# EAGLE board SparkFun_Qwiic_FS3000_proto_panel_c (EAGLE 9.6.2)
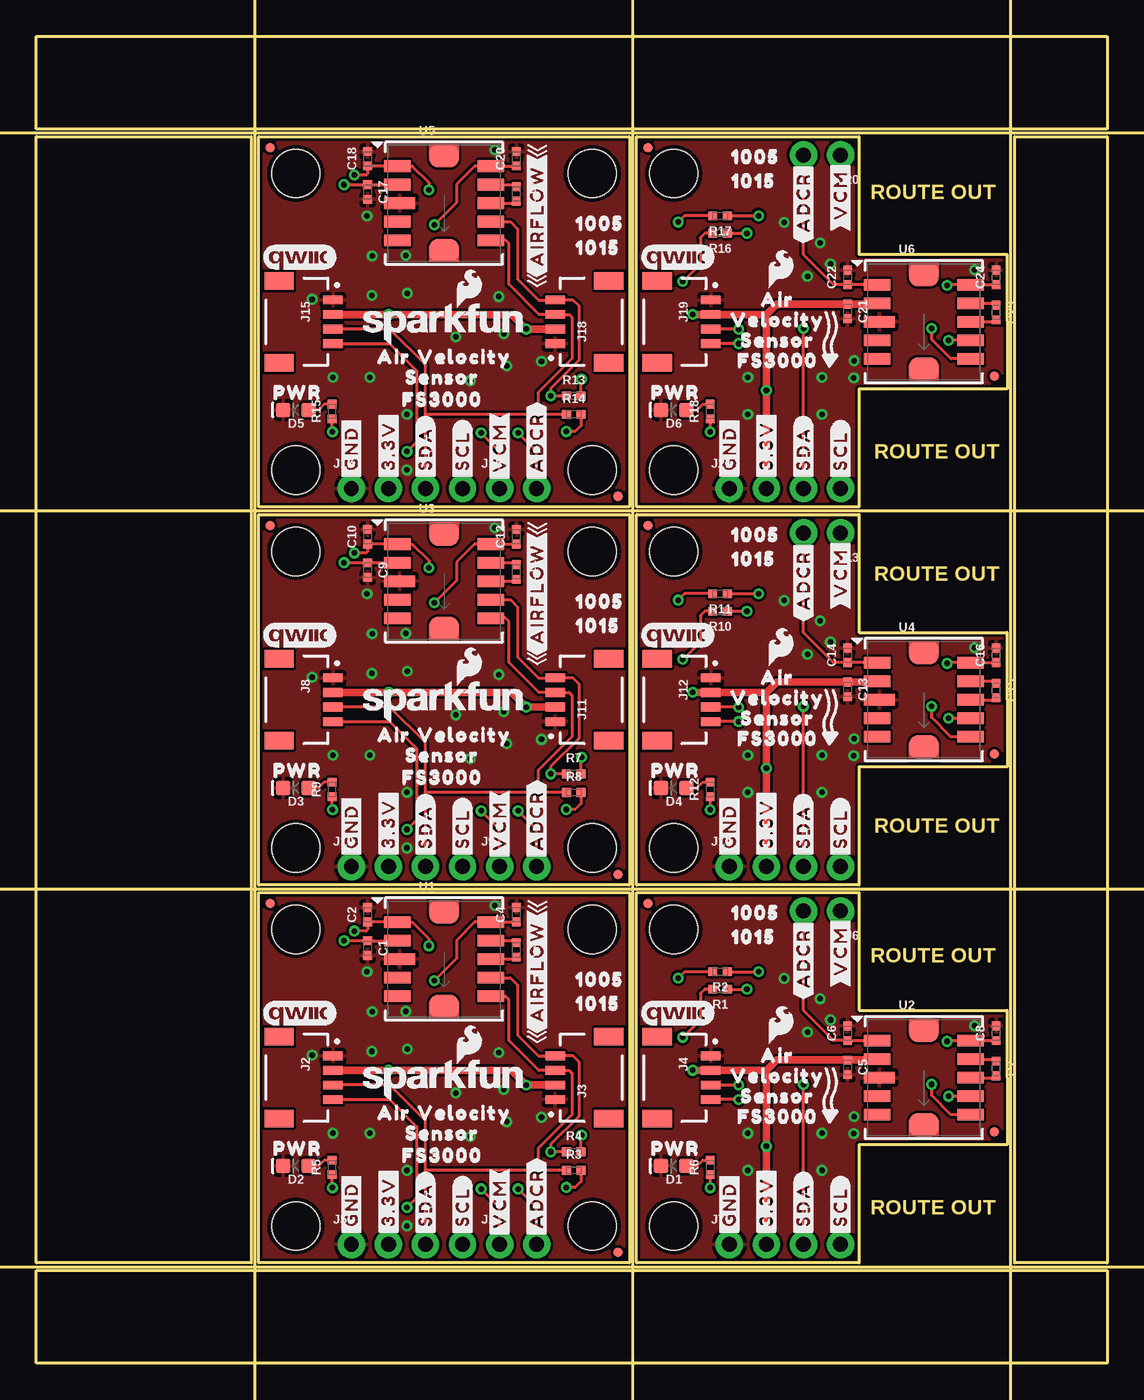
[diagram p0: board, top side]
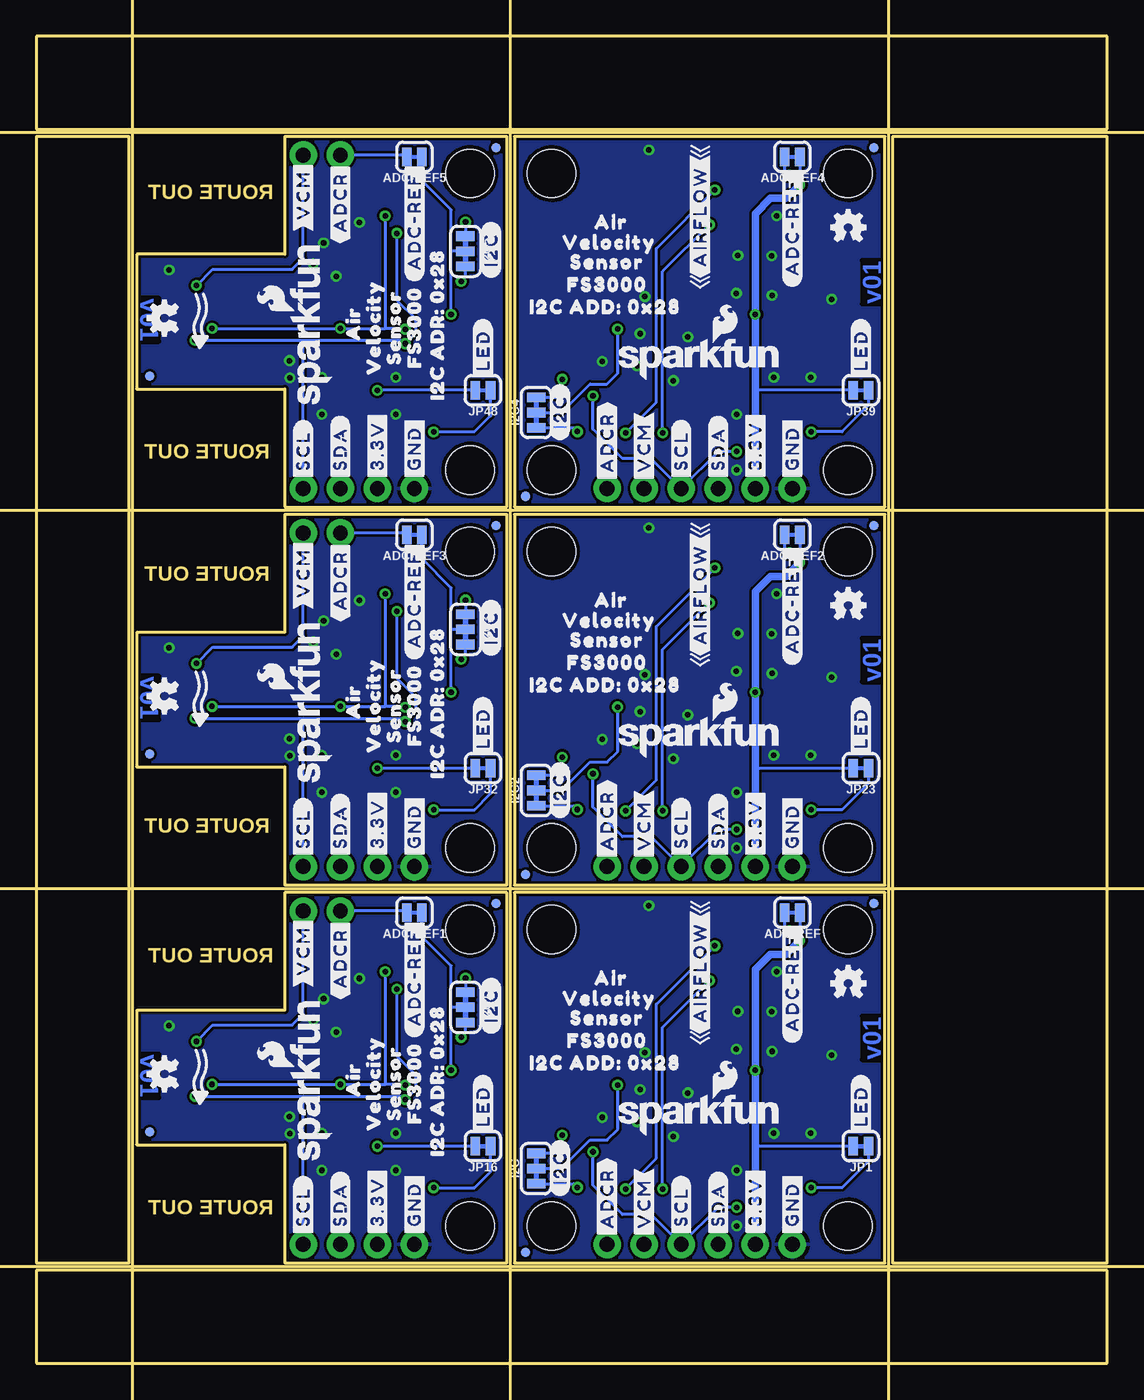
[diagram p1: board, bottom side, seen from below]

Size 73.41 x 90.93 mm. Coordinates in mm from the lower left corner, seen from the top.
Outline: 15.24,6.86 15.24,32.26 40.64,32.26 40.64,6.86 15.24,6.86
Outline: 41.15,6.86 41.15,32.26 56.39,32.26 56.39,24.18 66.52,24.18 66.55,14.96 56.39,14.96 56.39,6.86 41.15,6.86
Outline: 15.24,32.77 15.24,58.17 40.64,58.17 40.64,32.77 15.24,32.77
Outline: 41.15,32.77 41.15,58.17 56.39,58.17 56.39,50.09 66.52,50.09 66.55,40.87 56.39,40.87 56.39,32.77 41.15,32.77
Outline: 15.24,58.67 15.24,84.07 40.64,84.07 40.64,58.67 15.24,58.67
Outline: 41.15,58.67 41.15,84.07 56.39,84.07 56.39,76 66.52,76 66.55,66.78 56.39,66.78 56.39,58.67 41.15,58.67
Outline: 73.41,6.86 67.06,6.86 67.06,84.07 73.41,84.07 73.41,6.86
Outline: 73.41,90.93 73.41,84.58 0,84.58 0,90.93 73.41,90.93
Outline: 73.41,6.35 73.41,0 0,0 0,6.35 73.41,6.35
Outline: 14.73,6.86 0,6.86 0,84.07 14.73,84.07 14.73,6.86
Copper layers (1*16): Top 0.035mm / dielectric 1.5mm / Bottom 0.035mm
Design rules "SparkFun-2-Layer-General-JLCPCB": minimum track width 7mil, minimum drill 0.3mm, track to track 7mil, track to pad 7mil, pad to pad 7mil, via to via 7mil, smd to smd 7mil, copper to edge 7mil, drill to drill 7mil, minimum pad ring 7mil, minimum via ring 7mil, stop-mask expansion 3mil, vias tented up to drill 25mil, thermal gap 10mil
Milling: 7 lines

## Footprints (pad centres in the part's own frame; a part is rotated, then mirrored left to right if it is on the bottom)
SMT-JUMPER_2_NC_TRACE_SILK = smd 0.66 x 1.27: 1 -0.521,0; 2 0.521,0
0402-TIGHT = smd 0.6 x 0.6: 1 -0.5,0; 2 0.5,0
LED-0603 = smd 1 x 1: A -0.877,0; C 0.877,0
SMT-JUMPER_3_2-NC_TRACE_SILK = smd 0.66 x 1.27: 1 -1.041,0; 2 0,0; 3 1.041,0
1X02_NO_SILK = drill 1.016 pad 1.88: 1 0,0; 2 2.54,0
JST04_1MM_RA = smd 0.6 x 1.35: 1 -1.5,0; 2 -0.5,0; 3 0.5,0; 4 1.5,0 | smd 1.2 x 2: NC1 2.8,-3.675; NC2 -2.8,-3.675
1X04_NO_SILK = drill 1.016 pad 1.88: 1 0,0; 2 2.54,0; 3 5.08,0; 4 7.62,0
FIDUCIAL-MICRO = smd 0.635 x 0.635: 1 0,0
STAND-OFF = hole 3.302: 0,0
FS3000 = smd 1.8 x 0.8: 1 -3.2,2.54; 2 -3.2,1.27; 4 -3.2,-1.27; 5 -3.2,-2.54; 6 3.2,-2.54; 7 3.2,-1.27; 8 3.2,0; 9 3.2,1.27; 10 3.2,2.54 | smd 2.1 x 0.8: 3 -3.05,0 | smd 2 x 1.59: 11 0,-3.24; 12 0,3.24

## Placement (x,y rotation side)
ADC-REF  [SMT-JUMPER_2_NC_TRACE_SILK]  21.59,30.86 180 bottom
ADC-REF1  [SMT-JUMPER_2_NC_TRACE_SILK]  47.5,30.86 180 bottom
ADC-REF2  [SMT-JUMPER_2_NC_TRACE_SILK]  21.59,56.77 180 bottom
ADC-REF3  [SMT-JUMPER_2_NC_TRACE_SILK]  47.5,56.77 180 bottom
ADC-REF4  [SMT-JUMPER_2_NC_TRACE_SILK]  21.59,82.68 180 bottom
ADC-REF5  [SMT-JUMPER_2_NC_TRACE_SILK]  47.5,82.68 180 bottom
C1  0.1uF  [0402-TIGHT]  22.71,28.45 270 top
C2  0.1uF  [0402-TIGHT]  22.71,30.73 90 top
C3  0.1uF  [0402-TIGHT]  32.89,28.32 270 top
C4  1.0uF  [0402-TIGHT]  32.89,30.73 90 top
C5  0.1uF  [0402-TIGHT]  55.6,20.27 270 top
C6  0.1uF  [0402-TIGHT]  55.6,22.61 90 top
C7  0.1uF  [0402-TIGHT]  65.79,20.19 270 top
C8  1.0uF  [0402-TIGHT]  65.79,22.61 90 top
C9  0.1uF  [0402-TIGHT]  22.71,54.36 270 top
C10  0.1uF  [0402-TIGHT]  22.71,56.64 90 top
C11  0.1uF  [0402-TIGHT]  32.89,54.23 270 top
C12  1.0uF  [0402-TIGHT]  32.89,56.64 90 top
C13  0.1uF  [0402-TIGHT]  55.6,46.18 270 top
C14  0.1uF  [0402-TIGHT]  55.6,48.51 90 top
C15  0.1uF  [0402-TIGHT]  65.79,46.1 270 top
C16  1.0uF  [0402-TIGHT]  65.79,48.51 90 top
C17  0.1uF  [0402-TIGHT]  22.71,80.26 270 top
C18  0.1uF  [0402-TIGHT]  22.71,82.55 90 top
C19  0.1uF  [0402-TIGHT]  32.89,80.14 270 top
C20  1.0uF  [0402-TIGHT]  32.89,82.55 90 top
C21  0.1uF  [0402-TIGHT]  55.6,72.09 270 top
C22  0.1uF  [0402-TIGHT]  55.6,74.42 90 top
C23  0.1uF  [0402-TIGHT]  65.79,72.01 270 top
C24  1.0uF  [0402-TIGHT]  65.79,74.42 90 top
D1  RED  [LED-0603]  43.69,13.51 180 top
D2  RED  [LED-0603]  17.78,13.51 180 top
D3  RED  [LED-0603]  17.78,39.42 180 top
D4  RED  [LED-0603]  43.69,39.42 180 top
D5  RED  [LED-0603]  17.78,65.33 180 top
D6  RED  [LED-0603]  43.69,65.33 180 top
I2C  [SMT-JUMPER_3_2-NC_TRACE_SILK]  39.14,13.34 90 bottom
I2C1  [SMT-JUMPER_3_2-NC_TRACE_SILK]  43.99,24.38 270 bottom
I2C2  [SMT-JUMPER_3_2-NC_TRACE_SILK]  39.14,39.24 90 bottom
I2C3  [SMT-JUMPER_3_2-NC_TRACE_SILK]  43.99,50.29 270 bottom
I2C4  [SMT-JUMPER_3_2-NC_TRACE_SILK]  39.14,65.15 90 bottom
I2C5  [SMT-JUMPER_3_2-NC_TRACE_SILK]  43.99,76.2 270 bottom
J1  [1X02_NO_SILK]  31.75,8.13 0 top
J2  QWIIC_RA  [JST04_1MM_RA]  20.32,19.56 270 top
J3  QWIIC_RA  [JST04_1MM_RA]  35.56,19.56 90 top
J4  QWIIC_RA  [JST04_1MM_RA]  46.23,19.56 270 top
J5  [1X04_NO_SILK]  21.59,8.13 0 top
J6  [1X02_NO_SILK]  55.12,30.99 180 top
J7  [1X04_NO_SILK]  47.5,8.13 0 top
J8  QWIIC_RA  [JST04_1MM_RA]  20.32,45.47 270 top
J9  [1X02_NO_SILK]  31.75,34.04 0 top
J10  [1X04_NO_SILK]  21.59,34.04 0 top
J11  QWIIC_RA  [JST04_1MM_RA]  35.56,45.47 90 top
J12  QWIIC_RA  [JST04_1MM_RA]  46.23,45.47 270 top
J13  [1X02_NO_SILK]  55.12,56.9 180 top
J14  [1X04_NO_SILK]  47.5,34.04 0 top
J15  QWIIC_RA  [JST04_1MM_RA]  20.32,71.37 270 top
J16  [1X02_NO_SILK]  31.75,59.94 0 top
J17  [1X04_NO_SILK]  21.59,59.94 0 top
J18  QWIIC_RA  [JST04_1MM_RA]  35.56,71.37 90 top
J19  QWIIC_RA  [JST04_1MM_RA]  46.23,71.37 270 top
J20  [1X02_NO_SILK]  55.12,82.8 180 top
J21  [1X04_NO_SILK]  47.5,59.94 0 top
JP1  LED  [SMT-JUMPER_2_NC_TRACE_SILK]  16.89,14.86 180 bottom
JP2  FIDUCIALUFIDUCIAL  [FIDUCIAL-MICRO]  39.88,7.59 0 top
JP3  STAND-OFF  [STAND-OFF]  17.78,29.72 0 top
JP4  STAND-OFF  [STAND-OFF]  38.1,29.72 0 top
JP5  FIDUCIALUFIDUCIAL  [FIDUCIAL-MICRO]  16,31.5 0 bottom
JP6  FIDUCIALUFIDUCIAL  [FIDUCIAL-MICRO]  16,31.5 0 top
JP7  STAND-OFF  [STAND-OFF]  38.1,9.4 0 top
JP8  STAND-OFF  [STAND-OFF]  17.78,9.4 0 top
JP9  STAND-OFF  [STAND-OFF]  43.69,29.72 0 top
JP10  FIDUCIALUFIDUCIAL  [FIDUCIAL-MICRO]  65.66,15.85 0 top
JP11  FIDUCIALUFIDUCIAL  [FIDUCIAL-MICRO]  39.88,7.59 0 bottom
JP12  FIDUCIALUFIDUCIAL  [FIDUCIAL-MICRO]  41.91,31.5 0 top
JP13  FIDUCIALUFIDUCIAL  [FIDUCIAL-MICRO]  65.66,15.85 0 bottom
JP14  FIDUCIALUFIDUCIAL  [FIDUCIAL-MICRO]  41.91,31.5 0 bottom
JP15  STAND-OFF  [STAND-OFF]  43.69,9.4 0 top
JP16  LED  [SMT-JUMPER_2_NC_TRACE_SILK]  42.8,14.86 180 bottom
JP17  STAND-OFF  [STAND-OFF]  17.78,55.63 0 top
JP18  FIDUCIALUFIDUCIAL  [FIDUCIAL-MICRO]  39.88,33.5 0 top
JP19  FIDUCIALUFIDUCIAL  [FIDUCIAL-MICRO]  16,57.4 0 top
JP20  FIDUCIALUFIDUCIAL  [FIDUCIAL-MICRO]  39.88,33.5 0 bottom
JP21  FIDUCIALUFIDUCIAL  [FIDUCIAL-MICRO]  16,57.4 0 bottom
JP22  STAND-OFF  [STAND-OFF]  17.78,35.31 0 top
JP23  LED  [SMT-JUMPER_2_NC_TRACE_SILK]  16.89,40.77 180 bottom
JP24  STAND-OFF  [STAND-OFF]  38.1,55.63 0 top
JP25  STAND-OFF  [STAND-OFF]  38.1,35.31 0 top
JP26  STAND-OFF  [STAND-OFF]  43.69,55.63 0 top
JP27  FIDUCIALUFIDUCIAL  [FIDUCIAL-MICRO]  65.66,41.76 0 top
JP28  FIDUCIALUFIDUCIAL  [FIDUCIAL-MICRO]  41.91,57.4 0 top
JP29  FIDUCIALUFIDUCIAL  [FIDUCIAL-MICRO]  65.66,41.76 0 bottom
JP30  FIDUCIALUFIDUCIAL  [FIDUCIAL-MICRO]  41.91,57.4 0 bottom
JP31  STAND-OFF  [STAND-OFF]  43.69,35.31 0 top
JP32  LED  [SMT-JUMPER_2_NC_TRACE_SILK]  42.8,40.77 180 bottom
JP33  STAND-OFF  [STAND-OFF]  17.78,81.53 0 top
JP34  FIDUCIALUFIDUCIAL  [FIDUCIAL-MICRO]  39.88,59.41 0 top
JP35  FIDUCIALUFIDUCIAL  [FIDUCIAL-MICRO]  16,83.31 0 top
JP36  FIDUCIALUFIDUCIAL  [FIDUCIAL-MICRO]  39.88,59.41 0 bottom
JP37  FIDUCIALUFIDUCIAL  [FIDUCIAL-MICRO]  16,83.31 0 bottom
JP38  STAND-OFF  [STAND-OFF]  17.78,61.21 0 top
JP39  LED  [SMT-JUMPER_2_NC_TRACE_SILK]  16.89,66.67 180 bottom
JP40  STAND-OFF  [STAND-OFF]  38.1,81.53 0 top
JP41  STAND-OFF  [STAND-OFF]  38.1,61.21 0 top
JP42  STAND-OFF  [STAND-OFF]  43.69,81.53 0 top
JP43  FIDUCIALUFIDUCIAL  [FIDUCIAL-MICRO]  65.66,67.67 0 top
JP44  FIDUCIALUFIDUCIAL  [FIDUCIAL-MICRO]  41.91,83.31 0 top
JP45  FIDUCIALUFIDUCIAL  [FIDUCIAL-MICRO]  65.66,67.67 0 bottom
JP46  FIDUCIALUFIDUCIAL  [FIDUCIAL-MICRO]  41.91,83.31 0 bottom
JP47  STAND-OFF  [STAND-OFF]  43.69,61.21 0 top
JP48  LED  [SMT-JUMPER_2_NC_TRACE_SILK]  42.8,66.67 180 bottom
LOGO1  OSHW-LOGOMINI  [OSHW-LOGO-MINI]  17.75,26.04 0 bottom
LOGO2  OSHW-LOGOMINI  [OSHW-LOGO-MINI]  64.64,19.81 90 bottom
LOGO3  SFE_LOGO_NAME_FLAME.1_INCH  [SFE_LOGO_NAME_FLAME_.1]  27.94,17.02 0 bottom
LOGO4  QWIIC_LOGO_5MM  [QWIIC_5MM]  18.03,24 0 top
LOGO5  SFE_LOGO_NAME_FLAME.1_INCH  [SFE_LOGO_NAME_FLAME_.1]  27.94,19.43 0 top
LOGO6  QWIIC_LOGO_5MM  [QWIIC_5MM]  43.94,24 0 top
LOGO7  SFE_LOGO_FLAME.1_INCH  [SFE_LOGO_FLAME_.1]  51.03,23.19 0 top
LOGO8  SFE_LOGO_NAME_FLAME.1_INCH  [SFE_LOGO_NAME_FLAME_.1]  54.61,19.43 90 bottom
LOGO9  OSHW-LOGOMINI  [OSHW-LOGO-MINI]  17.75,51.94 0 bottom
LOGO10  QWIIC_LOGO_5MM  [QWIIC_5MM]  18.03,49.91 0 top
LOGO11  SFE_LOGO_NAME_FLAME.1_INCH  [SFE_LOGO_NAME_FLAME_.1]  27.94,45.34 0 top
LOGO12  SFE_LOGO_NAME_FLAME.1_INCH  [SFE_LOGO_NAME_FLAME_.1]  27.94,42.93 0 bottom
LOGO13  OSHW-LOGOMINI  [OSHW-LOGO-MINI]  64.64,45.72 90 bottom
LOGO14  QWIIC_LOGO_5MM  [QWIIC_5MM]  43.94,49.91 0 top
LOGO15  SFE_LOGO_FLAME.1_INCH  [SFE_LOGO_FLAME_.1]  51.03,49.1 0 top
LOGO16  SFE_LOGO_NAME_FLAME.1_INCH  [SFE_LOGO_NAME_FLAME_.1]  54.61,45.34 90 bottom
LOGO17  OSHW-LOGOMINI  [OSHW-LOGO-MINI]  17.75,77.85 0 bottom
LOGO18  QWIIC_LOGO_5MM  [QWIIC_5MM]  18.03,75.82 0 top
LOGO19  SFE_LOGO_NAME_FLAME.1_INCH  [SFE_LOGO_NAME_FLAME_.1]  27.94,71.25 0 top
LOGO20  SFE_LOGO_NAME_FLAME.1_INCH  [SFE_LOGO_NAME_FLAME_.1]  27.94,68.83 0 bottom
LOGO21  OSHW-LOGOMINI  [OSHW-LOGO-MINI]  64.64,71.63 90 bottom
LOGO22  QWIIC_LOGO_5MM  [QWIIC_5MM]  43.94,75.82 0 top
LOGO23  SFE_LOGO_FLAME.1_INCH  [SFE_LOGO_FLAME_.1]  51.03,75.01 0 top
LOGO24  SFE_LOGO_NAME_FLAME.1_INCH  [SFE_LOGO_NAME_FLAME_.1]  54.61,71.25 90 bottom
R1  2.2k  [0402-TIGHT]  46.86,25.63 180 top
R2  2.2k  [0402-TIGHT]  46.86,26.82 180 top
R3  2.2k  [0402-TIGHT]  36.83,13.21 0 top
R4  2.2k  [0402-TIGHT]  36.83,14.48 0 top
R5  1k  [0402-TIGHT]  20.27,13.41 90 top
R6  1k  [0402-TIGHT]  46.18,13.41 90 top
R7  2.2k  [0402-TIGHT]  36.83,40.39 0 top
R8  2.2k  [0402-TIGHT]  36.83,39.12 0 top
R9  1k  [0402-TIGHT]  20.27,39.32 90 top
R10  2.2k  [0402-TIGHT]  46.86,51.54 180 top
R11  2.2k  [0402-TIGHT]  46.86,52.73 180 top
R12  1k  [0402-TIGHT]  46.18,39.32 90 top
R13  2.2k  [0402-TIGHT]  36.83,66.29 0 top
R14  2.2k  [0402-TIGHT]  36.83,65.02 0 top
R15  1k  [0402-TIGHT]  20.27,65.23 90 top
R16  2.2k  [0402-TIGHT]  46.86,77.44 180 top
R17  2.2k  [0402-TIGHT]  46.86,78.64 180 top
R18  1k  [0402-TIGHT]  46.18,65.23 90 top
U1  FS3000  [FS3000]  27.94,27.69 0 top
U2  FS3000  [FS3000]  60.83,19.56 0 top
U3  FS3000  [FS3000]  27.94,53.59 0 top
U4  FS3000  [FS3000]  60.83,45.47 0 top
U5  FS3000  [FS3000]  27.94,79.5 0 top
U6  FS3000  [FS3000]  60.83,71.37 0 top
U$1  [#GND#0]  47.5,8.64 90 top
U$2  [#GND#0]  47.5,8.64 90 bottom
U$3  [#SCL#0]  29.21,8.64 90 bottom
U$4  [#SDA#0]  26.67,8.64 90 bottom
U$5  [#GND#0]  21.59,8.64 90 top
U$6  [#GND#0]  21.59,8.64 90 bottom
U$7  [#3#3V#0]  24.13,8.64 90 top
U$8  [#3#3V#0]  24.13,8.64 90 bottom
U$9  [#SDA#0]  26.67,8.64 90 top
U$10  [#ADCR#4]  34.29,8.51 90 top
U$11  [#SCL#0]  29.21,8.64 90 top
U$12  [10050]  38.61,26.29 0 top
U$13  [#ADCR#4]  34.29,8.51 90 bottom
U$14  [FS30001]  27.81,14.22 0 top
U$15  [#ADC#REF#0]  21.59,30.1 90 bottom
U$16  [VELOCITY30003]  29.34,17.14 0 top
U$17  [FS30001]  34.29,22.1 0 bottom
U$18  [AIR30004]  24.51,17.14 0 top
U$19  [SENSOR30005]  27.81,15.75 0 top
U$20  [VELOCITY30003]  34.14,24.99 0 bottom
U$21  [AIR30004]  34.01,26.39 0 bottom
U$22  [SENSOR30005]  34.29,23.65 0 bottom
U$23  [#AIRFLOW#0]  34.32,26.82 90 top
U$24  [#LED#0]  16.89,15.49 90 bottom
U$25  [PWR0]  17.88,14.71 0 top
U$26  [#AIRFLOW#0]  27.91,26.77 90 bottom
U$27  [#I2C#0]  37.52,15.24 90 bottom
U$28  [I2C_ADD#_0X280]  34.42,20.57 0 bottom
U$29  [10150]  38.48,24.64 0 top
U$30  [#VCM#3]  31.75,8.51 90 top
U$31  [#VCM#3]  31.75,8.51 90 bottom
U$32  [#3#3V#0]  50.04,8.64 90 top
U$33  [#3#3V#0]  50.04,8.64 90 bottom
U$34  [#SDA#0]  52.58,8.64 90 top
U$35  [#SCL#0]  55.12,8.64 90 top
U$36  [#LED#0]  42.8,15.49 90 bottom
U$37  [PWR0]  43.79,14.71 0 top
U$38  [#I2C#0]  42.24,26.37 90 bottom
U$39  [#VCM#0]  55.12,30.61 90 top
U$40  [#ADCR#0]  52.58,30.48 90 top
U$41  [#SCL#0]  55.12,8.64 90 bottom
U$42  [#SDA#0]  52.58,8.64 90 bottom
U$43  [#VCM#0]  55.12,30.61 90 bottom
U$44  [#ADCR#0]  52.58,30.48 90 bottom
U$45  [FS30001]  50.8,16.89 0 top
U$46  [VELOCITY30003]  50.8,19.68 0 top
U$47  [AIR30004]  50.8,21.08 0 top
U$48  [SENSOR30005]  50.8,18.29 0 top
U$49  [#ADC#REF#0]  47.5,30.48 90 bottom
U$50  [FS30001]  47.5,19.18 90 bottom
U$51  [VELOCITY30003]  50.29,19.18 90 bottom
U$52  [AIR30004]  51.69,19.43 90 bottom
U$53  [SENSOR30005]  48.9,19.18 90 bottom
U$54  [10050]  49.28,30.86 0 top
U$55  [10150]  49.15,29.21 0 top
U$56  [I2C_ADR#_0X280]  45.92,19.35 90 bottom
U$57  [#GND#0]  21.59,34.54 90 top
U$58  [#GND#0]  21.59,34.54 90 bottom
U$59  [#3#3V#0]  24.13,34.54 90 top
U$60  [#3#3V#0]  24.13,34.54 90 bottom
U$61  [#SDA#0]  26.67,34.54 90 top
U$62  [#SCL#0]  29.21,34.54 90 top
U$63  [#LED#0]  16.89,41.4 90 bottom
U$64  [PWR0]  17.88,40.61 0 top
U$65  [#I2C#0]  37.52,41.15 90 bottom
U$66  [#SCL#0]  29.21,34.54 90 bottom
U$67  [#SDA#0]  26.67,34.54 90 bottom
U$68  [FS30001]  27.81,40.13 0 top
U$69  [VELOCITY30003]  29.34,43.05 0 top
U$70  [AIR30004]  24.51,43.05 0 top
U$71  [SENSOR30005]  27.81,41.66 0 top
U$72  [#ADC#REF#0]  21.59,56.01 90 bottom
U$73  [FS30001]  34.29,48.01 0 bottom
U$74  [VELOCITY30003]  34.14,50.9 0 bottom
U$75  [AIR30004]  34.01,52.3 0 bottom
U$76  [SENSOR30005]  34.29,49.56 0 bottom
U$77  [#AIRFLOW#0]  34.32,52.73 90 top
U$78  [#AIRFLOW#0]  27.91,52.68 90 bottom
U$79  [I2C_ADD#_0X280]  34.42,46.48 0 bottom
U$80  [10050]  38.61,52.2 0 top
U$81  [10150]  38.48,50.55 0 top
U$82  [#ADCR#4]  34.29,34.42 90 top
U$83  [#ADCR#4]  34.29,34.42 90 bottom
U$84  [#VCM#3]  31.75,34.42 90 top
U$85  [#VCM#3]  31.75,34.42 90 bottom
U$86  [#GND#0]  47.5,34.54 90 top
U$87  [#GND#0]  47.5,34.54 90 bottom
U$88  [#3#3V#0]  50.04,34.54 90 top
U$89  [#3#3V#0]  50.04,34.54 90 bottom
U$90  [#SDA#0]  52.58,34.54 90 top
U$91  [#SCL#0]  55.12,34.54 90 top
U$92  [#LED#0]  42.8,41.4 90 bottom
U$93  [PWR0]  43.79,40.61 0 top
U$94  [#I2C#0]  42.24,52.27 90 bottom
U$95  [#VCM#0]  55.12,56.52 90 top
U$96  [#ADCR#0]  52.58,56.39 90 top
U$97  [#SCL#0]  55.12,34.54 90 bottom
U$98  [#SDA#0]  52.58,34.54 90 bottom
U$99  [#VCM#0]  55.12,56.52 90 bottom
U$100  [#ADCR#0]  52.58,56.39 90 bottom
U$101  [FS30001]  50.8,42.8 0 top
U$102  [VELOCITY30003]  50.8,45.59 0 top
U$103  [AIR30004]  50.8,46.99 0 top
U$104  [SENSOR30005]  50.8,44.2 0 top
U$105  [#ADC#REF#0]  47.5,56.39 90 bottom
U$106  [FS30001]  47.5,45.09 90 bottom
U$107  [VELOCITY30003]  50.29,45.09 90 bottom
U$108  [AIR30004]  51.69,45.34 90 bottom
U$109  [SENSOR30005]  48.9,45.09 90 bottom
U$110  [10050]  49.28,56.77 0 top
U$111  [10150]  49.15,55.12 0 top
U$112  [I2C_ADR#_0X280]  45.92,45.26 90 bottom
U$113  [#GND#0]  21.59,60.45 90 top
U$114  [#GND#0]  21.59,60.45 90 bottom
U$115  [#3#3V#0]  24.13,60.45 90 top
U$116  [#3#3V#0]  24.13,60.45 90 bottom
U$117  [#SDA#0]  26.67,60.45 90 top
U$118  [#SCL#0]  29.21,60.45 90 top
U$119  [#LED#0]  16.89,67.31 90 bottom
U$120  [PWR0]  17.88,66.52 0 top
U$121  [#I2C#0]  37.52,67.06 90 bottom
U$122  [#SCL#0]  29.21,60.45 90 bottom
U$123  [#SDA#0]  26.67,60.45 90 bottom
U$124  [FS30001]  27.81,66.04 0 top
U$125  [VELOCITY30003]  29.34,68.96 0 top
U$126  [AIR30004]  24.51,68.96 0 top
U$127  [SENSOR30005]  27.81,67.56 0 top
U$128  [#ADC#REF#0]  21.59,81.92 90 bottom
U$129  [FS30001]  34.29,73.91 0 bottom
U$130  [VELOCITY30003]  34.14,76.81 0 bottom
U$131  [AIR30004]  34.01,78.21 0 bottom
U$132  [SENSOR30005]  34.29,75.46 0 bottom
U$133  [#AIRFLOW#0]  34.32,78.64 90 top
U$134  [#AIRFLOW#0]  27.91,78.59 90 bottom
U$135  [I2C_ADD#_0X280]  34.42,72.39 0 bottom
U$136  [10050]  38.61,78.11 0 top
U$137  [10150]  38.48,76.45 0 top
U$138  [#ADCR#4]  34.29,60.33 90 top
U$139  [#ADCR#4]  34.29,60.33 90 bottom
U$140  [#VCM#3]  31.75,60.33 90 top
U$141  [#VCM#3]  31.75,60.33 90 bottom
U$142  [#GND#0]  47.5,60.45 90 top
U$143  [#GND#0]  47.5,60.45 90 bottom
U$144  [#3#3V#0]  50.04,60.45 90 top
U$145  [#3#3V#0]  50.04,60.45 90 bottom
U$146  [#SDA#0]  52.58,60.45 90 top
U$147  [#SCL#0]  55.12,60.45 90 top
U$148  [#LED#0]  42.8,67.31 90 bottom
U$149  [PWR0]  43.79,66.52 0 top
U$150  [#I2C#0]  42.24,78.18 90 bottom
U$151  [#VCM#0]  55.12,82.42 90 top
U$152  [#ADCR#0]  52.58,82.3 90 top
U$153  [#SCL#0]  55.12,60.45 90 bottom
U$154  [#SDA#0]  52.58,60.45 90 bottom
U$155  [#VCM#0]  55.12,82.42 90 bottom
U$156  [#ADCR#0]  52.58,82.3 90 bottom
U$157  [FS30001]  50.8,68.71 0 top
U$158  [VELOCITY30003]  50.8,71.5 0 top
U$159  [AIR30004]  50.8,72.9 0 top
U$160  [SENSOR30005]  50.8,70.1 0 top
U$161  [#ADC#REF#0]  47.5,82.3 90 bottom
U$162  [FS30001]  47.5,70.99 90 bottom
U$163  [VELOCITY30003]  50.29,70.99 90 bottom
U$164  [AIR30004]  51.69,71.25 90 bottom
U$165  [SENSOR30005]  48.9,70.99 90 bottom
U$166  [10050]  49.28,82.68 0 top
U$167  [10150]  49.15,81.03 0 top
U$168  [I2C_ADR#_0X280]  45.92,71.17 90 bottom

## Library data of the parts
ADC-REF ADC-REF1-ADC-REF5 I2C I2C1-I2C5 JP1 JP16 JP23 JP32 JP39 JP48 = SparkFun-Jumpers
C1-C3 C5-C7 C9-C11 C13-C15 C17-C19 C21-C23 = SparkFun-Capacitors; PROD_ID: CAP-12416
C4 C8 C12 C16 C20 C24 = SparkFun-Capacitors; PROD_ID: CAP-12417
D1-D6 = SparkFun-LED; PROD_ID: DIO-00819
J1 J6 J9 J13 J16 J20 = SparkFun-Connectors
J2 J4 J8 J12 J15 J19 = SparkFun-Connectors; PROD_ID: CONN-13694; VALUE: QWIIC_RIGHT_ANGLE
J3 J11 J18 = SparkFun-Connectors; PROD_ID: CONN-13694
J5 J7 J10 J14 J17 J21 = SparkFun-Connectors; PROD_ID: CONN-09696
JP2 JP5 JP6 JP10-JP14 JP18-JP21 JP27-JP30 JP34-JP37 JP43-JP46 LOGO1-LOGO24 = SparkFun-Aesthetics
JP3 JP4 JP7-JP9 JP15 JP17 JP22 JP24-JP26 JP31 JP33 JP38 JP40-JP42 JP47 = SparkFun-Hardware
R1-R4 R7 R8 R10 R11 R13 R14 R16 R17 = SparkFun-Resistors; PROD_ID: RES-14341
R5 R6 R9 R12 R15 R18 = SparkFun-Resistors; PROD_ID: RES-14342
U1-U6 = FS3000; PROD_ID: IC-16078
U$1-U$9 U$11 U$12 U$14-U$29 U$32-U$81 U$86-U$137 U$142-U$168 = output
U$10 U$13 U$30 U$31 U$82-U$85 U$138-U$141 = FS3000

## Nets
3.3V: ADC-REF.1 C1.1 I2C.2 J2.2 J3.2 J5.2 JP1.2 U1.2
3.3V1: ADC-REF1.1 C5.1 I2C1.2 J4.2 J7.2 JP16.2 U2.2
3.3V2: ADC-REF2.1 C9.1 I2C2.2 J8.2 J10.2 J11.2 JP23.2 U3.2
3.3V3: ADC-REF3.1 C13.1 I2C3.2 J12.2 J14.2 JP32.2 U4.2
3.3V4: ADC-REF4.1 C17.1 I2C4.2 J15.2 J17.2 J18.2 JP39.2 U5.2
3.3V5: ADC-REF5.1 C21.1 I2C5.2 J19.2 J21.2 JP48.2 U6.2
ADC-REF: ADC-REF.2 C2.1 J1.2 U1.1
ADC-REF1: ADC-REF1.2 C6.1 J6.2 U2.1
ADC-REF2: ADC-REF2.2 C10.1 J9.2 U3.1
ADC-REF3: ADC-REF3.2 C14.1 J13.2 U4.1
ADC-REF4: ADC-REF4.2 C18.1 J16.2 U5.1
ADC-REF5: ADC-REF5.2 C22.1 J20.2 U6.1
GND: C1.2 C2.2 C4.2 D2.C J2.1 J3.1 J5.1 U1.3
GND1: C5.2 C6.2 C8.2 D1.C J4.1 J7.1 U2.3
GND2: C9.2 C10.2 C12.2 D3.C J8.1 J10.1 J11.1 U3.3
GND3: C13.2 C14.2 C16.2 D4.C J12.1 J14.1 U4.3
GND4: C17.2 C18.2 C20.2 D5.C J15.1 J17.1 J18.1 U5.3
GND5: C21.2 C22.2 C24.2 D6.C J19.1 J21.1 U6.3
N$1: I2C.1 R3.2
N$2: I2C.3 R4.2
N$3: C3.1 U1.9
N$4: C3.2 U1.8
N$5: I2C1.1 R2.2
N$6: D2.A R5.2
N$7: I2C1.3 R1.2
N$8: JP1.1 R5.1
N$9: D1.A R6.2
N$10: JP16.1 R6.1
N$11: C7.1 U2.9
N$12: C7.2 U2.8
N$13: I2C2.1 R8.2
N$14: I2C2.3 R7.2
N$15: D3.A R9.2
N$16: JP23.1 R9.1
N$17: C11.1 U3.9
N$18: C11.2 U3.8
N$19: I2C3.1 R11.2
N$20: I2C3.3 R10.2
N$21: D4.A R12.2
N$22: JP32.1 R12.1
N$23: C15.1 U4.9
N$24: C15.2 U4.8
N$25: I2C4.1 R14.2
N$26: I2C4.3 R13.2
N$27: D5.A R15.2
N$28: JP39.1 R15.1
N$29: C19.1 U5.9
N$30: C19.2 U5.8
N$31: I2C5.1 R17.2
N$32: I2C5.3 R16.2
N$33: D6.A R18.2
N$34: JP48.1 R18.1
N$35: C23.1 U6.9
N$36: C23.2 U6.8
SCL: J2.4 J3.4 J5.4 R4.1 U1.7
SCL1: J4.4 J7.4 R1.1 U2.7
SCL2: J8.4 J10.4 J11.4 R7.1 U3.7
SCL3: J12.4 J14.4 R10.1 U4.7
SCL4: J15.4 J17.4 J18.4 R13.1 U5.7
SCL5: J19.4 J21.4 R16.1 U6.7
SDA: J2.3 J3.3 J5.3 R3.1 U1.6
SDA1: J4.3 J7.3 R2.1 U2.6
SDA2: J8.3 J10.3 J11.3 R8.1 U3.6
SDA3: J12.3 J14.3 R11.1 U4.6
SDA4: J15.3 J17.3 J18.3 R14.1 U5.6
SDA5: J19.3 J21.3 R17.1 U6.6
VCM: C4.1 J1.1 U1.10
VCM1: C8.1 J6.1 U2.10
VCM2: C12.1 J9.1 U3.10
VCM3: C16.1 J13.1 U4.10
VCM4: C20.1 J16.1 U5.10
VCM5: C24.1 J20.1 U6.10

## Tracks (layer width: path | path; a pad name or v marks a point on that pad's centre or on a via)
3.3V  (via drill 0.38)
  Top 0.203: v21.08,28.96 C1.1 24.73,28.95 U1.2
  Top 0.508: J2.2 24.12,20.06 | 24.12,20.06 v24.13,20.07 | J3.2 v33.57,19.06 32.57,20.06 24.12,20.06
  Bottom 0.203: ADC-REF.1 21.07,28.97 v21.08,28.96 | JP1.2 24.13,14.86 | I2C.2 37.41,13.34 35.46,15.29 34.29,15.29 33.55,16.03 33.55,19.04 v33.57,19.06
  Bottom 0.508: J5.2 24.13,14.86 v24.13,20.07 24.13,26.98 23.09,28.02 22.02,28.02 v21.08,28.96
3.3V1  (via drill 0.38)
  Top 0.508: 50.04,20.06 J4.2 44.99,20.06 v44.98,20.07 | 50.04,20.06 50.05,20.06 50.77,20.77 C5.1 57.57,20.77 U2.2 | J7.2 v50.04,14.86 50.04,20.06
  Bottom 0.203: JP16.2 v50.04,14.86 | v44.98,20.07 44.98,24.38 | 44.98,24.38 44.98,27.23 46.98,29.22 ADC-REF1.1 | I2C1.2 44.98,24.38
3.3V2  (via drill 0.38)
  Top 0.203: v21.08,54.86 C9.1 U3.2
  Top 0.508: J8.2 v24.12,45.97 | v24.12,45.97 v24.13,45.97 | J11.2 v33.57,44.97 32.57,45.97 v24.12,45.97
  Bottom 0.203: ADC-REF2.1 21.07,54.88 v21.08,54.86 | JP23.2 24.13,40.77 | I2C2.2 37.41,39.24 35.46,41.2 34.29,41.2 33.55,41.94 33.55,44.95 v33.57,44.97
  Bottom 0.508: J10.2 24.13,40.77 v24.13,45.97 24.13,52.88 23.09,53.92 22.02,53.92 v21.08,54.86
3.3V3  (via drill 0.38)
  Top 0.508: 50.04,45.97 J12.2 v44.99,45.97 v44.98,45.97 | 50.04,45.97 50.05,45.97 50.77,46.68 C13.1 57.57,46.68 U4.2 | J14.2 v50.04,40.77 50.04,45.97
  Bottom 0.203: JP32.2 v50.04,40.77 | v44.98,45.97 44.98,50.29 | 44.98,50.29 44.98,53.14 46.98,55.13 ADC-REF3.1 | I2C3.2 44.98,50.29
3.3V4  (via drill 0.38)
  Top 0.203: v21.08,80.77 22.7,80.77 C17.1 U5.2
  Top 0.508: J15.2 v24.12,71.87 | v24.12,71.87 v24.13,71.88 | J18.2 v33.57,70.87 32.57,71.87 v24.12,71.87
  Bottom 0.203: ADC-REF4.1 21.07,80.78 v21.08,80.77 | JP39.2 24.13,66.67 | I2C4.2 37.41,65.15 35.46,67.11 34.29,67.11 33.55,67.84 33.55,70.86 v33.57,70.87
  Bottom 0.508: J17.2 24.13,66.67 v24.13,71.88 24.13,78.79 23.09,79.83 22.02,79.83 v21.08,80.77
3.3V5  (via drill 0.38)
  Top 0.508: 50.04,71.87 J19.2 v44.99,71.87 v44.98,71.88 | 50.04,71.87 50.05,71.87 50.77,72.58 C21.1 57.57,72.58 U6.2 | J21.2 v50.04,66.67 50.04,71.87
  Bottom 0.203: JP48.2 v50.04,66.67 | v44.98,71.88 44.98,76.2 | 44.98,76.2 44.98,79.05 46.98,81.04 ADC-REF5.1 | I2C5.2 44.98,76.2
ADC-REF  (via drill 0.38)
  Top 0.203: v21.79,29.62 22.6,29.62 22.71,29.73 C2.1 U1.1 25.76,30.23 26.9,29.08 v26.9,28.6 | J1.2 34.29,10.67 v33.02,11.94
  Bottom 0.203: v21.79,29.62 22.11,29.93 ADC-REF.2 | v26.9,28.6 30.91,24.59 30.91,14.05 v33.02,11.94
ADC-REF1
  Top 0.203: U2.1 55.61,22.1 C6.1 54.63,22.11 52.58,24.16 J6.2
  Bottom 0.203: ADC-REF1.2 48.15,30.99 J6.2
ADC-REF2  (via drill 0.38)
  Top 0.203: v21.79,55.52 22.6,55.52 22.71,55.63 C10.1 24.73,56.14 U3.1 25.76,56.13 26.9,54.99 v26.9,54.51 | J9.2 34.29,36.58 v33.02,37.85
  Bottom 0.203: v21.79,55.52 22.11,55.84 ADC-REF2.2 | v26.9,54.51 30.91,50.49 30.91,39.95 v33.02,37.85
ADC-REF3
  Top 0.203: U4.1 C14.1 54.63,48.01 52.58,50.06 J13.2
  Bottom 0.203: ADC-REF3.2 48.15,56.9 J13.2
ADC-REF4  (via drill 0.38)
  Top 0.203: v21.79,81.43 22.6,81.43 22.71,81.54 C18.1 U5.1 25.76,82.04 26.9,80.9 v26.9,80.42 | J16.2 34.29,62.48 v33.02,63.75
  Bottom 0.203: v21.79,81.43 22.11,81.75 ADC-REF4.2 | v26.9,80.42 30.91,76.4 30.91,65.86 v33.02,63.75
ADC-REF5
  Top 0.203: U6.1 C22.1 54.63,73.92 52.58,75.97 J20.2
  Bottom 0.203: ADC-REF5.2 48.15,82.8 J20.2
GND  (via drill 0.38)
  other vias: 34.62,16.84 32.03,18.75 32.23,16.54 25.32,24.1 25.43,21.51 22.99,21.36 23.01,24.08 31.42,31.34 22.66,26.82 18.9,21.11 29.74,15.52 28.75,18.52 22.86,15.75 20.32,15.75 25.4,9.4 25.4,13.21 31.7,21.29
  pour Bottom: 15.24,6.86 15.24,32.26 40.64,32.26 40.64,6.86
  pour Top: 15.24,6.86 15.24,32.26 40.64,32.26 40.64,6.86
GND1  (via drill 0.38)
  other vias: 64.31,23.11 54.43,23.52 52.86,22.68 51.26,26.37 53.72,24.97 53.85,13.21 53.85,15.75 48.77,15.75 48.77,13.21 56.06,16.89 56.03,15.72
  pour Bottom: 41.15,6.86 41.15,32.26 66.55,32.26 66.55,6.86
  pour Top: 41.15,6.86 41.15,32.26 66.55,32.26 66.55,6.86
GND2  (via drill 0.38)
  other vias: 34.62,42.75 32.03,44.65 32.23,42.44 25.32,50.01 25.43,47.42 22.99,47.27 23.01,49.99 31.42,57.25 22.66,52.73 18.9,47.02 29.74,41.43 28.75,44.42 22.86,41.66 20.32,41.66 25.4,35.31 25.4,39.12 31.7,47.19
  pour Bottom: 15.24,32.77 15.24,58.17 40.64,58.17 40.64,32.77
  pour Top: 15.24,32.77 15.24,58.17 40.64,58.17 40.64,32.77
GND3  (via drill 0.38)
  other vias: 64.31,49.02 54.43,49.43 52.86,48.59 51.26,52.27 53.72,50.88 53.85,39.12 53.85,41.66 48.77,41.66 48.77,39.12 56.06,42.8 56.03,41.63
  pour Bottom: 41.15,32.77 41.15,58.17 66.55,58.17 66.55,32.77
  pour Top: 41.15,32.77 41.15,58.17 66.55,58.17 66.55,32.77
GND4  (via drill 0.38)
  other vias: 34.62,68.66 32.03,70.56 32.23,68.35 25.32,75.92 25.43,73.33 22.99,73.18 23.01,75.9 31.42,83.16 22.66,78.64 18.9,72.92 29.74,67.34 28.75,70.33 22.86,67.56 20.32,67.56 25.4,61.21 25.4,65.02 31.7,73.1
  pour Bottom: 15.24,58.67 15.24,84.07 40.64,84.07 40.64,58.67
  pour Top: 15.24,58.67 15.24,84.07 40.64,84.07 40.64,58.67
GND5  (via drill 0.38)
  other vias: 64.31,74.93 54.43,75.34 52.86,74.5 51.26,78.18 53.72,76.78 53.85,65.02 53.85,67.56 48.77,67.56 48.77,65.02 56.06,68.71 56.03,67.54
  pour Bottom: 41.15,58.67 41.15,84.07 66.55,84.07 66.55,58.67
  pour Top: 41.15,58.67 41.15,84.07 66.55,84.07 66.55,58.67
N$1  (via drill 0.38)
  Top 0.203: R3.2 37.33,12.44 36.93,12.04 v36.32,12.04
  Bottom 0.203: I2C.1 36.58,12.29 v36.32,12.04
N$2  (via drill 0.38)
  Top 0.203: R4.2 37.33,15.59 v37.36,15.62
  Bottom 0.203: v37.36,15.62 37.36,14.83 37.82,14.38 I2C.3
N$3
  Top 0.203: U1.9 32.76,28.96 C3.1
N$4
  Top 0.203: U1.8 32.76,27.69 C3.2
N$5  (via drill 0.38)
  Top 0.203: R2.2 44.42,26.82 v43.99,26.39
  Bottom 0.203: v43.99,26.39 I2C1.1
N$6
  Top 0.203: R5.2 19.73,13.91 19.33,13.51 D2.A
N$7  (via drill 0.38)
  Top 0.203: R1.2 45.82,25.63 45.52,25.32 45.52,23.52 44.32,22.33 v44.3,22.33
  Bottom 0.203: v44.3,22.33 43.99,22.63 I2C1.3
N$8  (via drill 0.38)
  Top 0.203: v20.3,12.01 20.27,12.04 R5.1
  Bottom 0.203: JP1.1 16.37,13.83 18.19,12.01 v20.3,12.01
N$9
  Top 0.203: D1.A 45.29,13.51 45.69,13.91 R6.2
N$10  (via drill 0.38)
  Top 0.203: R6.1 v46.18,12.01
  Bottom 0.203: v46.18,12.01 43.38,12.01 42.28,13.12 JP16.1
N$11
  Top 0.203: U2.9 65.65,20.83 C7.1
N$12
  Top 0.203: U2.8 65.65,19.56 C7.2
N$13  (via drill 0.38)
  Top 0.203: R8.2 37.33,38.35 36.93,37.95 v36.32,37.95
  Bottom 0.203: I2C2.1 36.58,38.2 v36.32,37.95
N$14  (via drill 0.38)
  Top 0.203: R7.2 37.33,41.5 v37.36,41.53
  Bottom 0.203: v37.36,41.53 37.36,40.74 37.82,40.28 I2C2.3
N$15
  Top 0.203: R9.2 19.73,39.82 19.33,39.42 D3.A
N$16  (via drill 0.38)
  Top 0.203: v20.3,37.92 20.27,37.95 R9.1
  Bottom 0.203: JP23.1 16.37,39.74 18.19,37.92 v20.3,37.92
N$17
  Top 0.203: U3.9 32.76,54.86 C11.1
N$18
  Top 0.203: U3.8 32.76,53.59 C11.2
N$19  (via drill 0.38)
  Top 0.203: R11.2 44.42,52.73 v43.99,52.3
  Bottom 0.203: v43.99,52.3 I2C3.1
N$20  (via drill 0.38)
  Top 0.203: R10.2 45.82,51.54 45.52,51.23 45.52,49.43 44.32,48.23 v44.3,48.23
  Bottom 0.203: v44.3,48.23 43.99,48.54 I2C3.3
N$21
  Top 0.203: D4.A 45.29,39.42 45.69,39.82 R12.2
N$22  (via drill 0.38)
  Top 0.203: R12.1 v46.18,37.92
  Bottom 0.203: v46.18,37.92 43.38,37.92 42.28,39.03 JP32.1
N$23
  Top 0.203: U4.9 65.65,46.74 C15.1
N$24
  Top 0.203: U4.8 65.65,45.47 C15.2
N$25  (via drill 0.38)
  Top 0.203: R14.2 37.33,64.25 36.93,63.86 v36.32,63.86
  Bottom 0.203: I2C4.1 36.58,64.11 v36.32,63.86
N$26  (via drill 0.38)
  Top 0.203: R13.2 37.33,67.4 v37.36,67.44
  Bottom 0.203: v37.36,67.44 37.36,66.65 37.82,66.19 I2C4.3
N$27
  Top 0.203: R15.2 19.73,65.73 19.33,65.33 D5.A
N$28  (via drill 0.38)
  Top 0.203: v20.3,63.83 20.27,63.86 R15.1
  Bottom 0.203: JP39.1 16.37,65.65 18.19,63.83 v20.3,63.83
N$29
  Top 0.203: U5.9 32.76,80.77 C19.1
N$30
  Top 0.203: U5.8 32.76,79.5 C19.2
N$31  (via drill 0.38)
  Top 0.203: R17.2 44.42,78.64 v43.99,78.21
  Bottom 0.203: v43.99,78.21 I2C5.1
N$32  (via drill 0.38)
  Top 0.203: R16.2 45.82,77.44 45.52,77.14 45.52,75.34 44.32,74.14 v44.3,74.14
  Bottom 0.203: v44.3,74.14 43.99,74.45 I2C5.3
N$33
  Top 0.203: D6.A 45.29,65.33 45.69,65.73 R18.2
N$34  (via drill 0.38)
  Top 0.203: R18.1 v46.18,63.83
  Bottom 0.203: v46.18,63.83 43.38,63.83 42.28,64.94 JP48.1
N$35
  Top 0.203: U6.9 65.65,72.64 C23.1
N$36
  Top 0.203: U6.8 65.65,71.37 C23.2
SCL  (via drill 0.38)
  Top 0.203: U1.7 32.49,26.42 32.99,25.91 32.99,22.48 34.42,21.06 J3.4 36.78,21.06 37.19,20.65 37.19,16.92 35.26,14.99 v35.26,14.48 R4.1 | J2.4 24.21,18.06 26.06,16.2 26.06,11.33 v25.4,10.67
  Bottom 0.203: v25.4,10.67 26.67,10.67 J5.4 31.27,10.19 33.25,10.19 35.26,12.19 v35.26,14.48
SCL1  (via drill 0.38)
  Top 0.203: U2.7 v62.53,18.29 | v48.13,18.06 J4.4 | R1.1 v48.7,25.63
  Bottom 0.203: v62.53,18.29 55.12,18.29 | 55.12,18.29 48.36,18.29 v48.13,18.06 47.42,18.77 47.42,19.76 48.7,21.04 v48.7,25.63 | J7.4 55.12,18.29
SCL2  (via drill 0.38)
  Top 0.203: U3.7 32.49,52.32 32.99,51.82 32.99,48.39 34.42,46.97 J11.4 36.78,46.97 37.19,46.56 37.19,42.82 35.26,40.89 v35.26,40.39 R7.1 | J8.4 24.21,43.97 26.06,42.11 26.06,37.24 v25.4,36.58
  Bottom 0.203: v25.4,36.58 26.67,36.58 J10.4 31.27,36.09 33.25,36.09 35.26,38.1 v35.26,40.39
SCL3  (via drill 0.38)
  Top 0.203: U4.7 v62.53,44.2 | v48.13,43.97 J12.4 | R10.1 v48.7,51.54
  Bottom 0.203: v62.53,44.2 55.12,44.2 | 55.12,44.2 48.36,44.2 v48.13,43.97 47.42,44.68 47.42,45.67 48.7,46.95 v48.7,51.54 | J14.4 55.12,44.2
SCL4  (via drill 0.38)
  Top 0.203: U5.7 32.49,78.23 32.99,77.72 32.99,74.3 34.42,72.87 J18.4 36.78,72.87 37.19,72.47 37.19,68.73 35.26,66.8 v35.26,66.29 R13.1 | J15.4 24.21,69.87 26.06,68.02 26.06,63.14 v25.4,62.48
  Bottom 0.203: v25.4,62.48 26.67,62.48 J17.4 31.27,62 33.25,62 35.26,64.01 v35.26,66.29
SCL5  (via drill 0.38)
  Top 0.203: U6.7 v62.53,70.1 | v48.13,69.88 J19.4 | R16.1 v48.7,77.44
  Bottom 0.203: v62.53,70.1 55.12,70.1 | 55.12,70.1 48.36,70.1 v48.13,69.88 47.42,70.59 47.42,71.58 48.7,72.86 v48.7,77.44 | J21.4 55.12,70.1
SDA
  Top 0.203: U1.6 32.16,25.15 32.38,24.92 32.38,22.12 34.45,20.06 J3.3 36.53,20.06 36.73,19.86 36.73,17.04 34.39,14.71 34.39,13.21 | J2.3 24.22,19.06 26.67,16.61 26.67,13.21 | J5.3 26.67,13.21 | R3.1 34.39,13.21 | 34.39,13.21 26.67,13.21
SDA1  (via drill 0.38)
  Top 0.203: U2.6 62.69,17.02 61.37,18.34 v61.37,19.1 | v48.13,19.05 J4.3 | J7.3 v52.58,19.1 | R2.1 v49.51,26.82
  Bottom 0.203: v61.37,19.1 v52.58,19.1 49.51,19.1 | v48.13,19.05 48.18,19.1 49.51,19.1 | v49.51,26.82 49.51,19.1
SDA2
  Top 0.203: U3.6 32.16,51.05 32.38,50.83 32.38,48.03 34.45,45.97 J11.3 36.53,45.97 36.73,45.77 36.73,42.95 34.39,40.62 34.39,39.12 | J8.3 24.22,44.97 26.67,42.52 26.67,39.12 | J10.3 26.67,39.12 | R8.1 34.39,39.12 | 34.39,39.12 26.67,39.12
SDA3  (via drill 0.38)
  Top 0.203: U4.6 62.69,42.93 61.37,44.25 v61.37,45.01 | v48.13,44.96 46.24,44.96 J12.3 | J14.3 v52.58,45.01 | R11.1 v49.51,52.73
  Bottom 0.203: v61.37,45.01 v52.58,45.01 49.51,45.01 | v48.13,44.96 48.18,45.01 49.51,45.01 | v49.51,52.73 49.51,45.01
SDA4
  Top 0.203: U5.6 32.16,76.96 32.38,76.73 32.38,73.94 34.45,71.87 J18.3 36.53,71.87 36.73,71.68 36.73,68.86 34.39,66.52 34.39,65.02 | J15.3 24.22,70.87 26.67,68.43 26.67,65.02 | J17.3 26.67,65.02 | R14.1 34.39,65.02 | 34.39,65.02 26.67,65.02
SDA5  (via drill 0.38)
  Top 0.203: U6.6 62.69,68.83 61.37,70.16 v61.37,70.92 | v48.13,70.87 J19.3 | J21.3 v52.58,70.92 | R17.1 v49.51,78.64
  Bottom 0.203: v61.37,70.92 v52.58,70.92 49.51,70.92 | v48.13,70.87 48.18,70.92 49.51,70.92 | v49.51,78.64 49.51,70.92
VCM  (via drill 0.38)
  Top 0.203: C4.1 U1.10 30.05,30.23 28.8,28.98 28.8,27.74 v27.28,26.21 | J1.1 31.75,10.67 v30.48,11.94
  Bottom 0.203: v27.28,26.21 30.48,23.01 v30.48,11.94
VCM1  (via drill 0.38)
  Top 0.203: C8.1 U2.10 62.48,22.1 v62.43,22.05
  Bottom 0.203: J6.1 55.12,23.93 55.88,23.16 61.32,23.16 v62.43,22.05
VCM2  (via drill 0.38)
  Top 0.203: C12.1 U3.10 30.05,56.13 28.8,54.89 28.8,53.65 v27.28,52.12 | J9.1 31.75,36.58 v30.48,37.85
  Bottom 0.203: v27.28,52.12 30.48,48.92 v30.48,37.85
VCM3  (via drill 0.38)
  Top 0.203: C16.1 U4.10 62.48,48.01 v62.43,47.95
  Bottom 0.203: J13.1 55.12,49.84 55.88,49.07 61.32,49.07 v62.43,47.95
VCM4  (via drill 0.38)
  Top 0.203: C20.1 U5.10 30.05,82.04 28.8,80.8 28.8,79.55 v27.28,78.03 | J16.1 31.75,62.48 v30.48,63.75
  Bottom 0.203: v27.28,78.03 30.48,74.83 v30.48,63.75
VCM5  (via drill 0.38)
  Top 0.203: C24.1 64.04,73.92 U6.10 62.48,73.91 v62.43,73.86
  Bottom 0.203: J20.1 55.12,75.74 55.88,74.98 61.32,74.98 v62.43,73.86

## Text on the board
Bottom: v01 | v01 | v01 | v01 | v01 | v01
Dimension: ROUTE OUT | ROUTE OUT | ROUTE OUT | ROUTE OUT | ROUTE OUT | ROUTE OUT
Milling: V-Score | V-Score | V-Score | V-Score | V-Score | V-Score | V-Score